# EAGLE board MultiEffect (EAGLE 9.6.2)
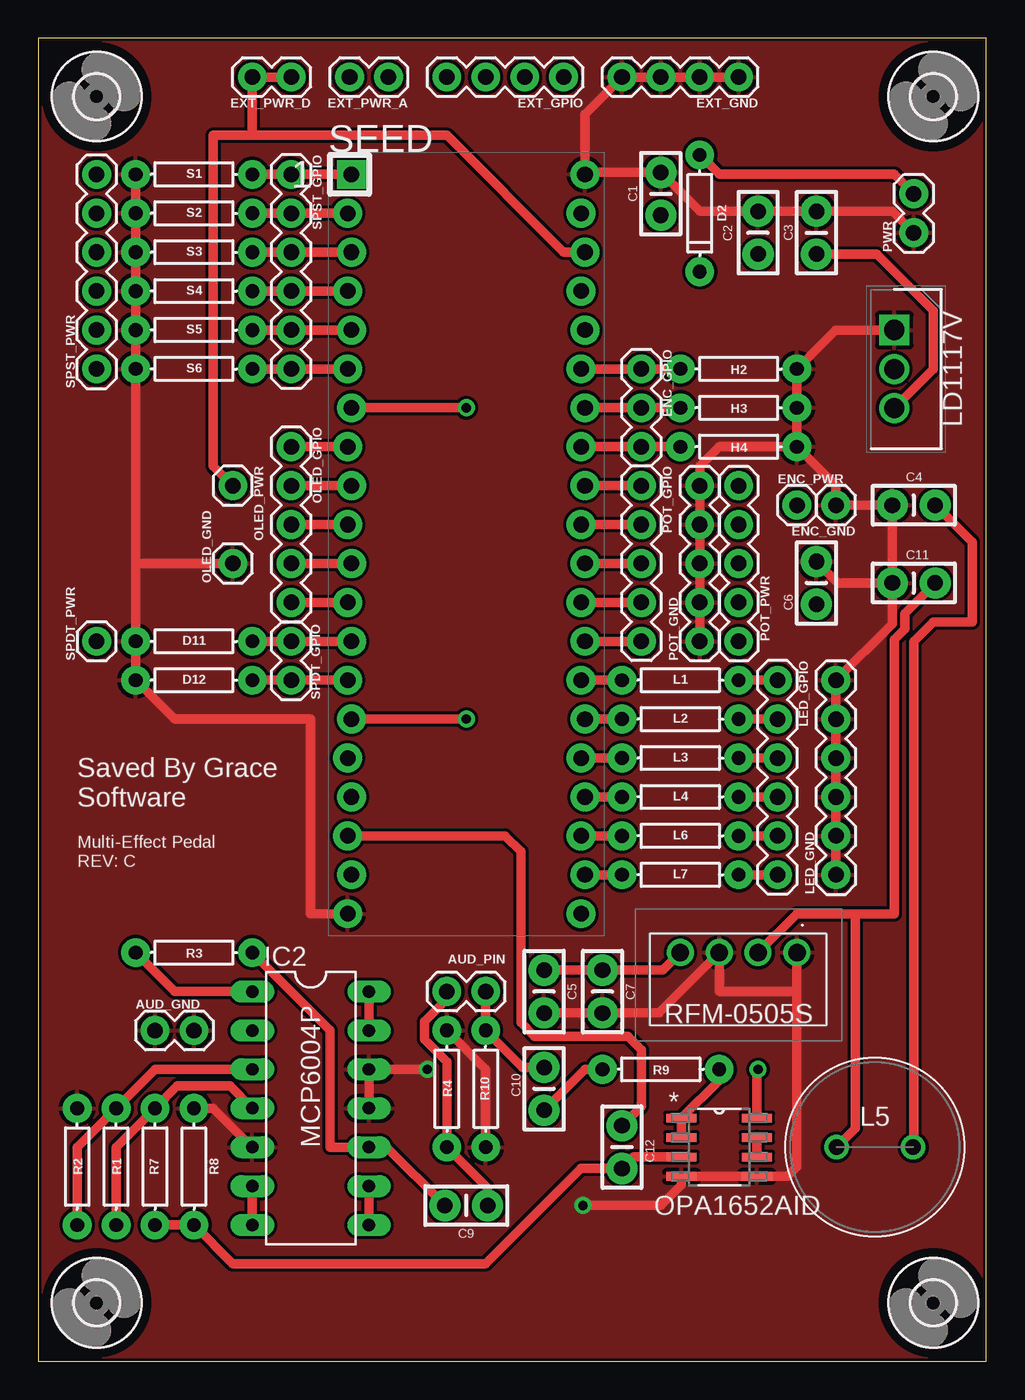
[diagram p0: board, top side]
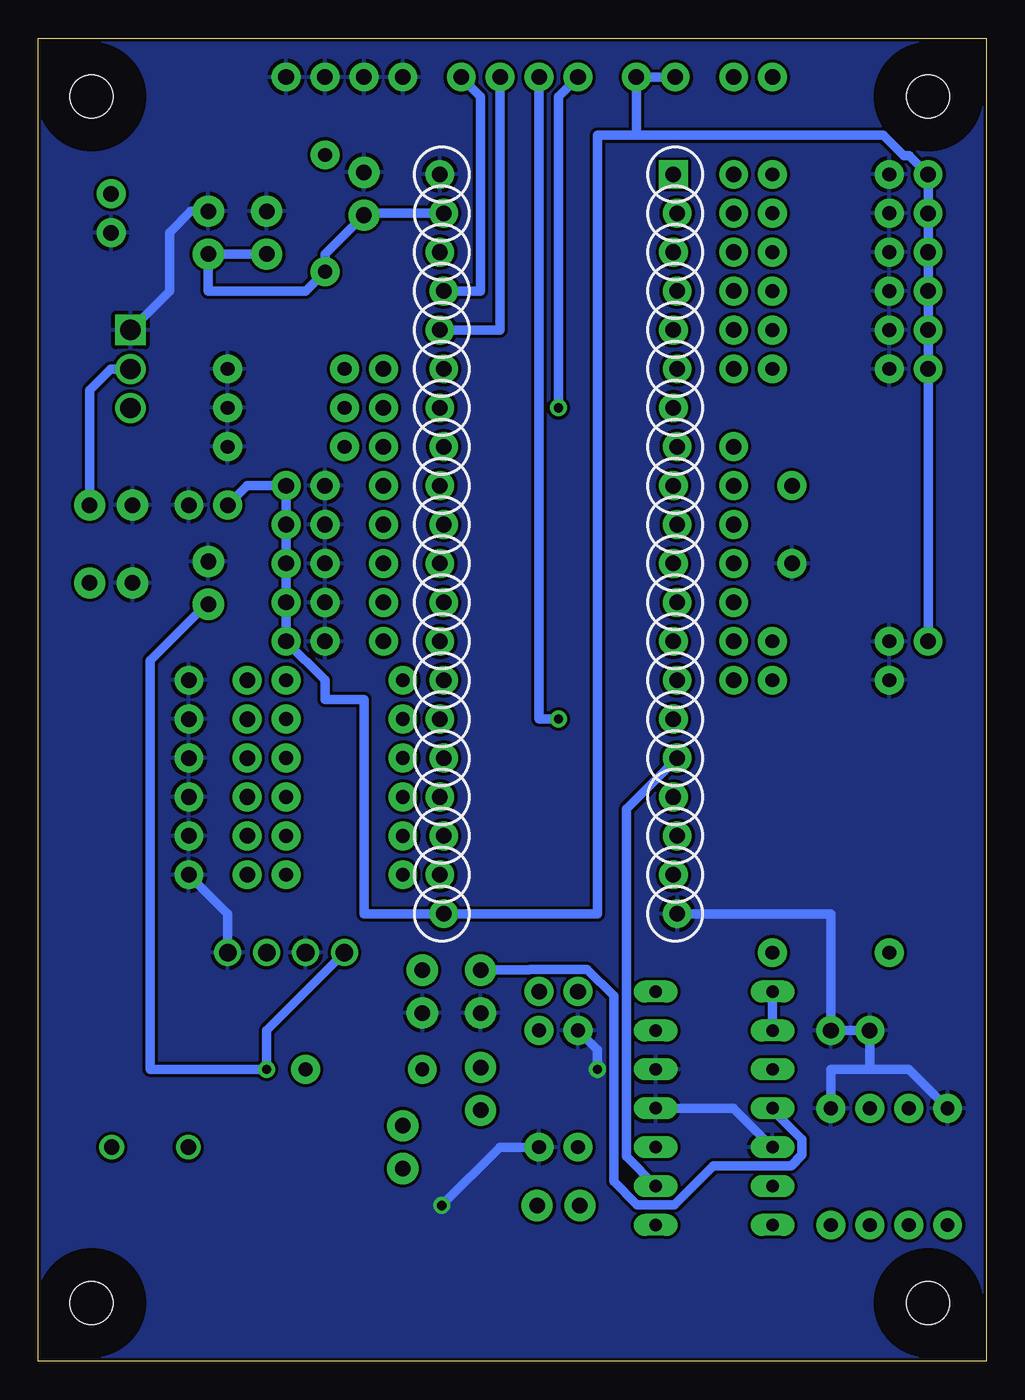
[diagram p1: board, bottom side, seen from below]

Size 61.9 x 86.35 mm. Coordinates in mm from the lower left corner, seen from the top.
Outline: 0,0 61.9,0 61.9,86.35 0,86.35 0,0
Copper layers (1*16): Top 0.035mm / dielectric 1.5mm / Bottom 0.035mm
Design rules "SparkFun": minimum track width 8mil, minimum drill 20mil, track to track 8mil, track to pad 8mil, pad to pad 8mil, via to via 8mil, smd to smd 8mil, copper to edge 8mil, drill to drill 8mil, minimum pad ring 12mil, minimum via ring 10mil, stop-mask expansion 4mil, vias tented up to drill 20mil, thermal gap 10mil
Net classes: 0 DEFAULT: width 0.102 mm, drill 0.2 mm, clearance 0.102 mm

## Footprints (pad centres in the part's own frame; a part is rotated, then mirrored left to right if it is on the bottom)
1X02 = drill 1.016 pad 1.88: 1 0,0; 2 2.54,0
CAP-PTH-SMALL-KIT = drill 1.016 pad 2.032: 1 -1.397,0; 2 1.397,0
DIODE-1N4148 = drill 0.9 pad 1.88: A -3.81,0; C 3.81,0
AXIAL-0.3 = drill 0.9 pad 1.88: P$1 -3.81,0; P$2 3.81,0
1X01 = drill 1.016 pad 1.88: 1 0,0
1X03 = drill 1.016 pad 1.88: 1 0,0; 2 2.54,0; 3 5.08,0
1X04 = drill 1.016 pad 1.88: 1 0,0; 2 2.54,0; 3 5.08,0; 4 7.62,0
2,8 = hole 2.8: 0,0
TO255P460X1020X2008-3P = drill 1.32 pad 1.98 square: 1 0,0 | drill 1.32 pad 1.98: 2 2.55,0; 3 5.1,0
DIL14 = drill 0.813 long: 1 -7.62,-3.81; 2 -5.08,-3.81; 3 -2.54,-3.81; 4 0,-3.81; 5 2.54,-3.81; 6 5.08,-3.81; 7 7.62,-3.81; 8 7.62,3.81; 9 5.08,3.81; 10 2.54,3.81; 11 0,3.81; 12 -2.54,3.81; 13 -5.08,3.81; 14 -7.62,3.81
WE-TIS_111190 = drill 1 pad 1.5: 1 -2.5,0; 2 2.5,0
1X06 = drill 1.016 pad 1.88: 1 0,0; 2 2.54,0; 3 5.08,0; 4 7.62,0; 5 10.16,0; 6 12.7,0
1X05 = drill 1.016 pad 1.88: 1 0,0; 2 2.54,0; 3 5.08,0; 4 7.62,0; 5 10.16,0
RFM0505S = drill 1.15 pad 1.725: 1 0,0; 2 2.54,0; 3 5.08,0; 4 7.62,0
ES_DAISY_SEED = drill 1.016 pad 1.88 square: 1 -7.493,24.13 | drill 1.016 pad 1.88: 2 -7.747,21.59; 3 -7.493,19.05; 4 -7.747,16.51; 5 -7.493,13.97; 6 -7.747,11.43; 7 -7.493,8.89; 8 -7.747,6.35; 9 -7.493,3.81; 10 -7.747,1.27; 11 -7.493,-1.27; 12 -7.747,-3.81; 13 -7.493,-6.35; 14 -7.747,-8.89; 15 -7.493,-11.43; 16 -7.747,-13.97; 17 -7.493,-16.51; 18 -7.747,-19.05; 19 -7.493,-21.59; 20 -7.747,-24.13; 21 7.493,-24.13; 22 7.747,-21.59; 23 7.493,-19.05; 24 7.747,-16.51; 25 7.493,-13.97; 26 7.747,-11.43; 27 7.493,-8.89; 28 7.747,-6.35; 29 7.493,-3.81; 30 7.747,-1.27; 31 7.493,1.27; 32 7.747,3.81; 33 7.493,6.35; 34 7.747,8.89; 35 7.493,11.43; 36 7.747,13.97; 37 7.493,16.51; 38 7.747,19.05; 39 7.493,21.59; 40 7.747,24.13
D8 = smd 1.981 x 0.559: 1 -2.464,1.905; 2 -2.464,0.635; 3 -2.464,-0.635; 4 -2.464,-1.905; 5 2.464,-1.905; 6 2.464,-0.635; 7 2.464,0.635; 8 2.464,1.905

## Placement (x,y rotation side)
AUD_GND  [1X02]  7.62,21.59 0 top
AUD_PIN  [1X02]  29.21,24.13 180 top
C1  0.1UF  [CAP-PTH-SMALL-KIT]  40.64,76.2 90 top
C2  10UF  [CAP-PTH-SMALL-KIT]  46.99,73.66 270 top
C3  0.1UF  [CAP-PTH-SMALL-KIT]  50.8,73.66 90 top
C4  10UF  [CAP-PTH-SMALL-KIT]  57.15,55.88 0 top
C5  0.1UF  [CAP-PTH-SMALL-KIT]  33.02,24.13 270 top
C6  22UF  [CAP-PTH-SMALL-KIT]  50.8,50.8 90 top
C7  0.1UF  [CAP-PTH-SMALL-KIT]  36.83,24.13 270 top
C9  10UF  [CAP-PTH-SMALL-KIT]  27.94,10.16 180 top
C10  10UF  [CAP-PTH-SMALL-KIT]  33.02,17.78 90 top
C11  10UF  [CAP-PTH-SMALL-KIT]  57.15,50.8 0 top
C12  10UF  [CAP-PTH-SMALL-KIT]  38.1,13.97 270 top
D2  200mA/100V/1V  [DIODE-1N4148]  43.18,74.93 270 top
D11  10k  [AXIAL-0.3]  10.16,46.99 0 top
D12  10k  [AXIAL-0.3]  10.16,44.45 0 top
ENC_GND  [1X01]  52.07,55.88 180 top
ENC_GPIO  [1X03]  39.37,64.77 270 top
ENC_PWR  [1X01]  49.53,55.88 0 top
EXT_GND  [1X04]  45.72,83.82 180 top
EXT_GPIO  [1X04]  34.29,83.82 180 top
EXT_PWR_A  [1X02]  22.86,83.82 180 top
EXT_PWR_D  [1X02]  16.51,83.82 180 top
H2  10k  [AXIAL-0.3]  45.72,64.77 180 top
H3  10k  [AXIAL-0.3]  45.72,62.23 180 top
H4  10k  [AXIAL-0.3]  45.72,59.69 180 top
H5  MOUNT-HOLE2.8  [2,8]  3.81,3.81 0 top
H6  MOUNT-HOLE2.8  [2,8]  58.42,82.55 0 top
H7  MOUNT-HOLE2.8  [2,8]  58.42,3.81 0 top
H8  MOUNT-HOLE2.8  [2,8]  3.81,82.55 0 top
IC1  LD1117V  [TO255P460X1020X2008-3P]  55.88,67.31 270 top
IC2  MCP6004P  [DIL14]  17.78,16.51 270 top
L1  330  [AXIAL-0.3]  41.91,44.45 0 top
L2  330  [AXIAL-0.3]  41.91,41.91 0 top
L3  330  [AXIAL-0.3]  41.91,39.37 0 top
L4  330  [AXIAL-0.3]  41.91,36.83 0 top
L5  7447471022  [WE-TIS_111190]  54.61,13.97 180 top
L6  330  [AXIAL-0.3]  41.91,34.29 0 top
L7  330  [AXIAL-0.3]  41.91,31.75 0 top
LED_GND  [1X06]  52.07,31.75 90 top
LED_GPIO  [1X06]  48.26,44.45 270 top
OLED_GND  [1X01]  12.7,52.07 90 top
OLED_GPIO  [1X05]  16.51,59.69 270 top
OLED_PWR  [1X01]  12.7,57.15 270 top
POT_GND  [1X05]  43.18,46.99 90 top
POT_GPIO  [1X05]  39.37,57.15 270 top
POT_PWR  [1X05]  45.72,46.99 90 top
PS1  RFM-0505S  [RFM0505S]  49.53,26.67 180 top
PWR  [1X02]  57.15,73.66 90 top
R1  100k  [AXIAL-0.3]  5.08,12.7 270 top
R2  100k  [AXIAL-0.3]  2.54,12.7 270 top
R3  2M  [AXIAL-0.3]  10.16,26.67 180 top
R4  2M  [AXIAL-0.3]  26.67,17.78 270 top
R7  2M  [AXIAL-0.3]  7.62,12.7 90 top
R8  2M  [AXIAL-0.3]  10.16,12.7 270 top
R9  100  [AXIAL-0.3]  40.64,19.05 180 top
R10  2M  [AXIAL-0.3]  29.21,17.78 90 top
S1  10k  [AXIAL-0.3]  10.16,77.47 0 top
S2  10k  [AXIAL-0.3]  10.16,74.93 0 top
S3  10k  [AXIAL-0.3]  10.16,72.39 0 top
S4  10k  [AXIAL-0.3]  10.16,69.85 0 top
S5  10k  [AXIAL-0.3]  10.16,67.31 0 top
S6  10k  [AXIAL-0.3]  10.16,64.77 0 top
SEED  ES_DAISY_SEED_REV4  [ES_DAISY_SEED]  27.94,53.34 0 top
SPDT_GPIO  [1X02]  16.51,44.45 90 top
SPDT_PWR  [1X01]  3.81,46.99 90 top
SPST_GPIO  [1X06]  16.51,77.47 270 top
SPST_PWR  [1X06]  3.81,64.77 90 top
U1  OPA1652AID  [D8]  44.45,13.97 0 top

## Library data of the parts
AUD_GND AUD_PIN ENC_GND ENC_GPIO ENC_PWR EXT_PWR_A EXT_PWR_D OLED_GND OLED_GPIO OLED_PWR POT_GND POT_GPIO POT_PWR PWR SPDT_GPIO SPDT_PWR = SparkFun-Connectors
C1-C7 C9-C12 IC2 = Custom-Parts
D2 = SparkFun-DiscreteSemi; PROD_ID: DIO-08378
D11 D12 H2-H4 S1-S6 = SparkFun-Resistors; PROD_ID: RES-09435
EXT_GND EXT_GPIO = SparkFun-Connectors; PROD_ID: CONN-09696
H5-H8 = holes
IC1 = SamacSys_Parts; ARROW_PART_NUMBER: LD1117V; ARROW_PRICE-STOCK: https://www.arrow.com/en/products/ld1117v/stmicroelectronics; DESCRIPTION: I.C. LD1117V; HEIGHT: 4.6mm; MANUFACTURER_NAME: STMicroelectronics; MANUFACTURER_PART_NUMBER: LD1117V; MOUSER_PART_NUMBER: 511-LD1117V; MOUSER_PRICE-STOCK: https://www.mouser.co.uk/ProductDetail/STMicroelectronics/LD1117V?qs=tZUCD5p2VWqhC74a4KMNzA%3D%3D
L1-L4 L6 L7 = SparkFun-Resistors; PROD_ID: RES-8371
L5 = SamacSys_Parts; DESCRIPTION: Wurth 2.2 uH +/-20% Ferrite Leaded Inductor, Max SRF:75MHz, 10A Idc, 0.009 Rdc WE-TIS; HEIGHT: mm; MANUFACTURER_NAME: Wurth Elektronik; MANUFACTURER_PART_NUMBER: 7447471022; MOUSER_PART_NUMBER: 710-7447471022; MOUSER_PRICE-STOCK: https://www.mouser.com/Search/Refine.aspx?Keyword=710-7447471022
LED_GND LED_GPIO SPST_GPIO SPST_PWR = SparkFun-Connectors; PROD_ID: CONN-08437
PS1 = SamacSys_Parts; DESCRIPTION: RECOM POWER - RFM-0505S - DC-DC CONVERTER, 5V, 0.2A; HEIGHT: 10.5mm; MANUFACTURER_NAME: RECOM Power; MANUFACTURER_PART_NUMBER: RFM-0505S; MOUSER_PART_NUMBER: 919-RFM-0505S; MOUSER_PRICE-STOCK: https://www.mouser.co.uk/ProductDetail/RECOM-Power/RFM-0505S?qs=lYGu3FyN48dRVYKTH5ipqg%3D%3D
R1 R2 = SparkFun-Resistors; PROD_ID: RES-10686
R3 R4 R7 R8 R10 = Custom-Parts; PROD_ID: RES-09329
R9 = SparkFun-Resistors; PROD_ID: RES-12181
SEED = Electrosmith-Boards; IPN: Daisy Seed
U1 = Custom-Parts; DATASHEET_URL: http://www.ti.com/lit/gpn/OPA1652; DESCRIPTION: Sound Plus Low Noise and Distortion, General-Purpose, FET-Input Audio Op Amps; FAMILY_NAME: LOW NOISE; GENERIC_PART_NUMBER: OPA1652; INDUSTRY_STD_PKG_TYPE: SOIC; MANUFACTURER: Texas Instruments; MANUFACTURER_PART_NUMBER: OPA1652AID; PACKAGE_DESIGNATOR: D; PIN_COUNT: 8; VENDOR: Texas Instruments

## Nets
+3V3_A: ENC_PWR.1 EXT_PWR_A.1 EXT_PWR_A.2 POT_PWR.1 POT_PWR.2 POT_PWR.3 POT_PWR.4 POT_PWR.5 SEED.21 SPDT_PWR.1 SPST_PWR.1 SPST_PWR.2 SPST_PWR.3 SPST_PWR.4 SPST_PWR.5 SPST_PWR.6
+3V3_D: EXT_PWR_D.1 EXT_PWR_D.2 OLED_PWR.1 SEED.38
+5V_ISOL: C5.1 C6.1 C7.1 IC2.4 PS1.4 R1.P$2 R7.P$2 U1.8
+9V_IN: C1.1 C2.2 C3.1 D2.C IC1.3 SEED.39
CS: OLED_GPIO.1 SEED.8
DC: OLED_GPIO.3 SEED.10
ENC_A: ENC_GPIO.3 H4.P$2 SEED.33
ENC_B: ENC_GPIO.2 H3.P$2 SEED.34
ENC_SW: ENC_GPIO.1 H2.P$2 SEED.35
EXT_1: EXT_GPIO.4 SEED.7
EXT_2: EXT_GPIO.3 SEED.15
EXT_3: EXT_GPIO.2 SEED.36
EXT_4: EXT_GPIO.1 SEED.37
GND: AUD_GND.1 AUD_GND.2 C1.2 C2.1 C3.2 C4.1 C5.2 C6.2 C7.2 C11.1 D11.P$1 D12.P$1 ENC_GND.1 EXT_GND.1 EXT_GND.2 EXT_GND.3 EXT_GND.4 H2.P$1 H3.P$1 H4.P$1 IC1.1 IC2.5 IC2.11 IC2.12 LED_GND.1 LED_GND.2 LED_GND.3 LED_GND.4 LED_GND.5 LED_GND.6 OLED_GND.1 POT_GND.1 POT_GND.2 POT_GND.3 POT_GND.4 POT_GND.5 PS1.1 PS1.3 PWR.1 R2.P$1 R4.P$1 R8.P$1 R10.P$1 S1.P$1 S2.P$1 S3.P$1 S4.P$1 S5.P$1 S6.P$1 SEED.20 SEED.40 U1.4 U1.5
IN_L: IC2.8 IC2.9 SEED.16
IN_L_JACK: AUD_PIN.2 C9.1 R4.P$2
LED1: L1.P$1 SEED.27
LED2: L2.P$1 SEED.26
LED3: L3.P$1 SEED.25
LED4: L4.P$1 SEED.24
LED5: L6.P$1 SEED.23
LED6: L7.P$1 SEED.22
N$1: L1.P$2 LED_GPIO.1
N$2: D2.A PWR.2
N$3: L2.P$2 LED_GPIO.2
N$4: L3.P$2 LED_GPIO.3
N$5: L4.P$2 LED_GPIO.4
N$6: IC2.3 R1.P$1 R2.P$2
N$7: C11.2 L5.2 PS1.2
N$8: C4.2 IC1.2 L5.1
N$9: C9.2 IC2.10 R3.P$1
N$10: IC2.13 IC2.14
N$11: L6.P$2 LED_GPIO.5
N$12: C12.2 R7.P$1 R8.P$2 U1.3
N$13: R9.P$1 U1.1 U1.2
N$14: C10.1 R9.P$2
N$15: U1.6 U1.7
N$16: L7.P$2 LED_GPIO.6
N$18: IC2.6 IC2.7
OUT_L: C12.1 SEED.18
OUT_L_JACK: AUD_PIN.1 C10.2 R10.P$2
POT1: POT_GPIO.1 SEED.32
POT2: POT_GPIO.2 SEED.31
POT3: POT_GPIO.3 SEED.30
POT4: POT_GPIO.4 SEED.29
POT5: POT_GPIO.5 SEED.28
RES: OLED_GPIO.5 SEED.12
SCL: OLED_GPIO.2 SEED.9
SDA: OLED_GPIO.4 SEED.11
SPDT1_1: D11.P$2 SEED.13 SPDT_GPIO.2
SPDT1_2: D12.P$2 SEED.14 SPDT_GPIO.1
SPST1: S1.P$2 SEED.1 SPST_GPIO.1
SPST2: S2.P$2 SEED.2 SPST_GPIO.2
SPST3: S3.P$2 SEED.3 SPST_GPIO.3
SPST4: S4.P$2 SEED.4 SPST_GPIO.4
SPST5: S5.P$2 SEED.5 SPST_GPIO.5
SPST6: S6.P$2 SEED.6 SPST_GPIO.6
V_AUDIOBIAS: IC2.1 IC2.2 R3.P$2

## Tracks (layer width: path | path; a pad name or v marks a point on that pad's centre or on a via)
+3V3_A
  Bottom 0.61: ENC_PWR.1 48.26,57.15 POT_PWR.5 POT_PWR.4 POT_PWR.3 POT_PWR.2 POT_PWR.1 43.18,44.45 43.18,43.18 40.64,43.18 40.64,29.21 SEED.21 25.4,29.21 25.4,80.01 22.86,80.01 | SPDT_PWR.1 SPST_PWR.1 SPST_PWR.2 SPST_PWR.3 SPST_PWR.4 SPST_PWR.5 SPST_PWR.6 5.03,78.69 5.41,78.69 6.73,80.01 22.86,80.01 | 22.86,80.01 EXT_PWR_A.1 EXT_PWR_A.2
+3V3_D
  Top 0.61: OLED_PWR.1 11.43,58.42 11.43,80.01 13.97,80.01 | SEED.38 34.29,72.39 26.67,80.01 13.97,80.01 | 13.97,80.01 EXT_PWR_D.2 EXT_PWR_D.1
+5V_ISOL  (via drill 0.6)
  Top 0.61: PS1.4 40.77,25.53 C7.1 C5.1 | R1.P$2 5.08,13.97 R7.P$2 9.07,17.96 12.52,17.96 IC2.4 | v46.99,19.05 46.91,18.97 U1.8
  Bottom 0.61: C6.1 50.93,49.4 54.61,45.72 54.61,19.05 v46.99,19.05 46.99,21.59 PS1.4 | C5.1 29.86,25.53 29.81,25.58 26.07,25.58 24.33,23.84 24.33,11.74 22.81,10.21 20.37,10.21 17.83,12.75 12.75,12.75 12.04,13.46 12.04,14.47 13.97,16.41 IC2.4
+9V_IN
  Top 0.61: IC1.3 58.42,64.75 58.42,68.58 54.74,72.26 C3.1
  Bottom 0.61: C2.2 C3.1 50.8,69.85 44.45,69.85 D2.C 43.18,72.26 C1.1 40.51,74.93 SEED.39
CS
  Top 0.61: OLED_GPIO.1 SEED.8
DC
  Top 0.61: OLED_GPIO.3 SEED.10
ENC_A
  Top 0.61: H4.P$2 ENC_GPIO.3 SEED.33
ENC_B
  Top 0.61: SEED.34 ENC_GPIO.2 H3.P$2
ENC_SW
  Top 0.61: SEED.35 ENC_GPIO.1 H2.P$2
EXT_1  (via drill 0.6)
  Top 0.61: SEED.7 v27.94,62.23
  Bottom 0.61: EXT_GPIO.4 27.94,82.55 v27.94,62.23
EXT_2  (via drill 0.6)
  Top 0.61: SEED.15 v27.94,41.91
  Bottom 0.61: v27.94,41.91 29.21,41.91 EXT_GPIO.3
EXT_3
  Bottom 0.61: SEED.36 31.75,67.31 EXT_GPIO.2
EXT_4
  Bottom 0.61: SEED.37 33.02,69.85 33.02,82.55 EXT_GPIO.1
GND  (via drill 0.6)
  Top 0.61: 49.53,24.13 PS1.1 | IC2.11 IC2.12 v25.4,19.05 | 49.53,24.13 44.45,24.13 PS1.3 40.51,22.73 C7.2 C5.2 | C11.1 C4.1 ENC_GND.1 52.07,57.15 H4.P$1 | C6.2 52.2,50.8 C11.1 | IC1.1 52.07,67.31 H2.P$1 H3.P$1 H4.P$1 | POT_GND.1 POT_GND.2 POT_GND.3 POT_GND.4 POT_GND.5 43.18,58.42 44.45,59.69 H4.P$1 | LED_GND.1 LED_GND.2 LED_GND.3 LED_GND.4 LED_GND.5 LED_GND.6 55.75,48.13 C11.1 | IC2.5 11.43,16.51 R8.P$1 | 49.53,24.13 49.53,12.7 48.9,12.06 U1.5 U1.4 41.99,11.51 40.64,10.16 v35.56,10.16 | R4.P$1 29.21,19.05 R10.P$1 | SEED.20 17.78,29.21 17.78,41.91 8.89,41.91 D12.P$1 D11.P$1 6.35,52.07 | 6.35,52.07 S6.P$1 S5.P$1 S4.P$1 S3.P$1 S2.P$1 S1.P$1 | OLED_GND.1 6.35,52.07 | PWR.1 55.75,75.06 C3.2 C2.1 43.18,75.06 C1.2 35.81,77.6 SEED.40 35.69,81.41 EXT_GND.4 EXT_GND.3 EXT_GND.2 EXT_GND.1
  Bottom 0.61: IC2.5 16.51,16.51 IC2.11 | C3.2 51.94,75.06 53.34,73.66 53.34,69.85 IC1.1 | PS1.1 49.53,29.21 LED_GND.1 | R2.P$1 5.08,19.05 7.62,19.05 | 7.62,19.05 10.16,19.05 R8.P$1 | R10.P$1 31.75,13.97 v35.56,10.16 | 7.62,19.05 AUD_GND.1 AUD_GND.2 10.16,29.21 SEED.20 | v25.4,19.05 25.4,20.32 R4.P$1
  pour Top: 0,0 0,86.36 62.23,86.36 62.23,0
  pour Bottom: 0,86.36 0,0 62.23,0 62.23,86.36
IN_L
  Top 0.61: IC2.8 IC2.9
  Bottom 0.61: IC2.9 23.52,13.36 23.52,36.04 SEED.16
IN_L_JACK
  Top 0.61: C9.1 29.34,11.3 R4.P$2 26.67,19.54 25.22,20.99 25.22,22.19 26.67,23.64 AUD_PIN.2
LED1
  Top 0.61: SEED.27 L1.P$1
LED2
  Top 0.61: SEED.26 L2.P$1
LED3
  Top 0.61: SEED.25 L3.P$1
LED4
  Top 0.61: SEED.24 L4.P$1
LED5
  Top 0.61: SEED.23 L6.P$1
LED6
  Top 0.61: SEED.22 L7.P$1
N$1
  Top 0.61: L1.P$2 LED_GPIO.1
N$2
  Top 0.61: D2.A 44.45,77.47 55.88,77.47 PWR.2
N$3
  Top 0.61: L2.P$2 LED_GPIO.2
N$4
  Top 0.61: L3.P$2 LED_GPIO.3
N$5
  Top 0.61: L4.P$2 LED_GPIO.4
N$6
  Top 0.61: R2.P$2 2.54,13.97 R1.P$1 7.62,19.05 IC2.3
N$7
  Top 0.61: PS1.2 49.53,29.21 53.34,29.21 | 53.34,29.21 53.34,15.2 L5.2 | 53.34,29.21 55.88,29.21 55.88,47.11 56.57,47.8 56.57,48.82 C11.2
N$8
  Top 0.61: L5.1 57.15,14.01 57.15,46.99 58.42,48.26 60.96,48.26 60.96,53.47 C4.2
  Bottom 0.61: IC1.2 57.16,64.76 58.55,63.37 C4.2
N$9
  Top 0.61: C9.2 22.73,13.97 IC2.10 19.05,13.97 19.05,21.59 R3.P$1
N$10
  Top 0.61: IC2.14 IC2.13
N$11
  Top 0.61: L6.P$2 LED_GPIO.5
N$12
  Top 0.61: R7.P$1 R8.P$2 12.7,6.35 29.21,6.35 35.43,12.57 C12.2 38.86,13.34 U1.3
N$13
  Top 0.61: U1.2 U1.1 44.45,18.34 R9.P$1
N$14
  Top 0.61: R9.P$2 35.69,19.05 C10.1
N$15
  Top 0.61: U1.7 U1.6
N$16
  Top 0.61: L7.P$2 LED_GPIO.6
N$18
  Top 0.61: IC2.6 IC2.7
OUT_L
  Top 0.61: SEED.18 30.48,34.29 31.5,33.27 31.5,22.1 32.39,21.21 38.48,21.21 39.37,20.32 39.37,16.64 C12.1
OUT_L_JACK
  Top 0.61: C10.2 31.62,19.18 R10.P$2 AUD_PIN.1
POT1
  Top 0.61: SEED.32 POT_GPIO.1
POT2
  Top 0.61: SEED.31 POT_GPIO.2
POT3
  Top 0.61: SEED.30 POT_GPIO.3
POT4
  Top 0.61: SEED.29 POT_GPIO.4
POT5
  Top 0.61: SEED.28 POT_GPIO.5
RES
  Top 0.61: OLED_GPIO.5 SEED.12
SCL
  Top 0.61: OLED_GPIO.2 SEED.9
SDA
  Top 0.61: OLED_GPIO.4 SEED.11
SPDT1_1
  Top 0.61: SEED.13 SPDT_GPIO.2 D11.P$2
SPDT1_2
  Top 0.61: SEED.14 SPDT_GPIO.1 D12.P$2
SPST1
  Top 0.61: S1.P$2 SPST_GPIO.1 SEED.1
SPST2
  Top 0.61: S2.P$2 SPST_GPIO.2 SEED.2
SPST3
  Top 0.61: S3.P$2 SPST_GPIO.3 SEED.3
SPST4
  Top 0.61: S4.P$2 SPST_GPIO.4 SEED.4
SPST5
  Top 0.61: SEED.5 SPST_GPIO.5 S5.P$2
SPST6
  Top 0.61: SEED.6 SPST_GPIO.6 S6.P$2
V_AUDIOBIAS
  Top 0.61: IC2.1 8.89,24.13 R3.P$2
  Bottom 0.61: IC2.1 IC2.2

## Text on the board
tNames: Saved By Grace / Software | Multi-Effect Pedal / REV: C